# Altium PCB PCB.PcbDoc
Units mil, origin at the board's own origin, x right, y up, seen from the top; angles counter-clockwise.
Board outline 1518.74 x 1345 mil, 2 copper layers (Top Layer, Bottom Layer); 4 components, 5 nets, 10 pads, 0 vias.
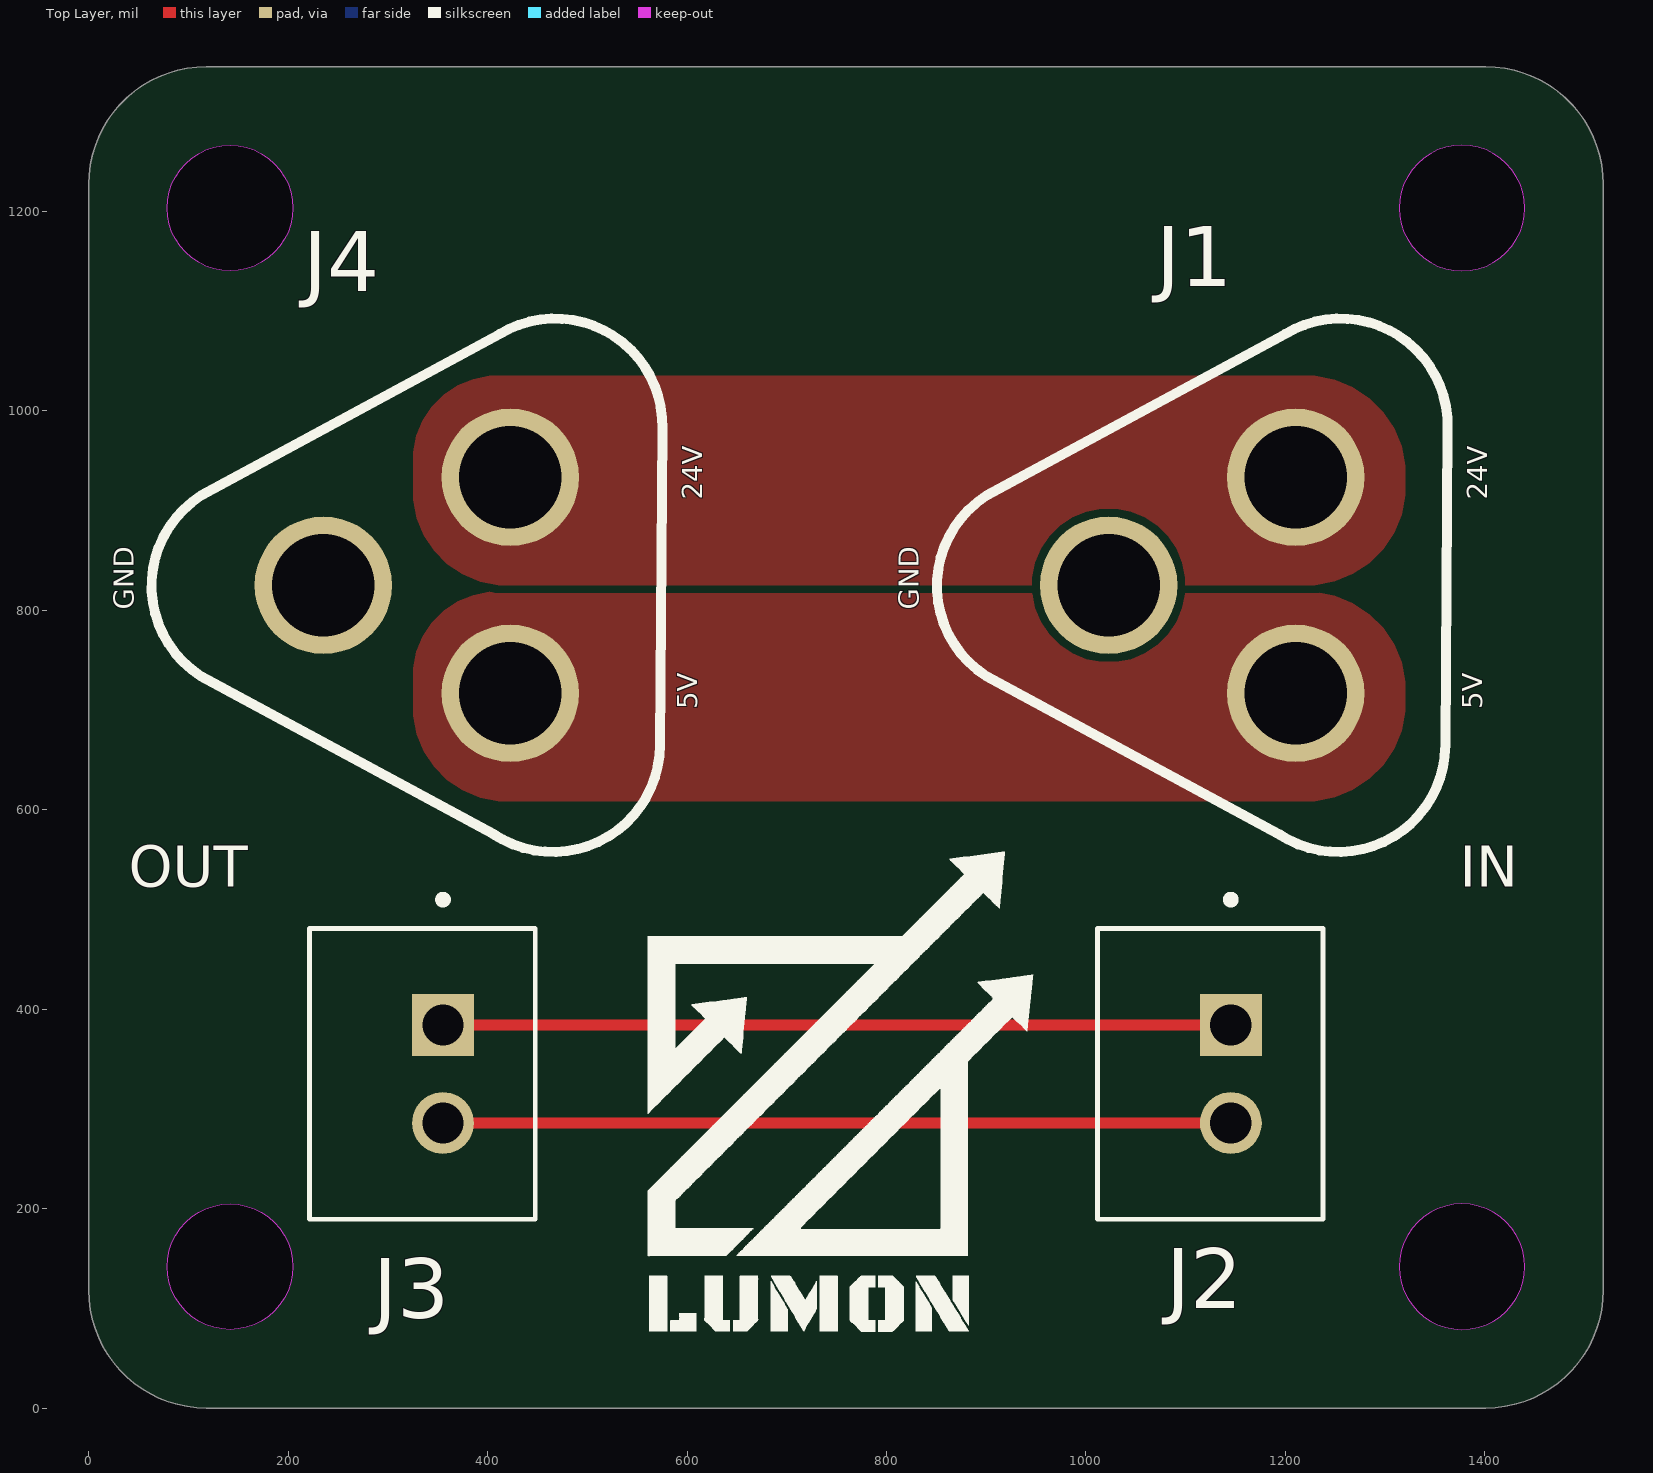
[diagram p0: Top Layer view]
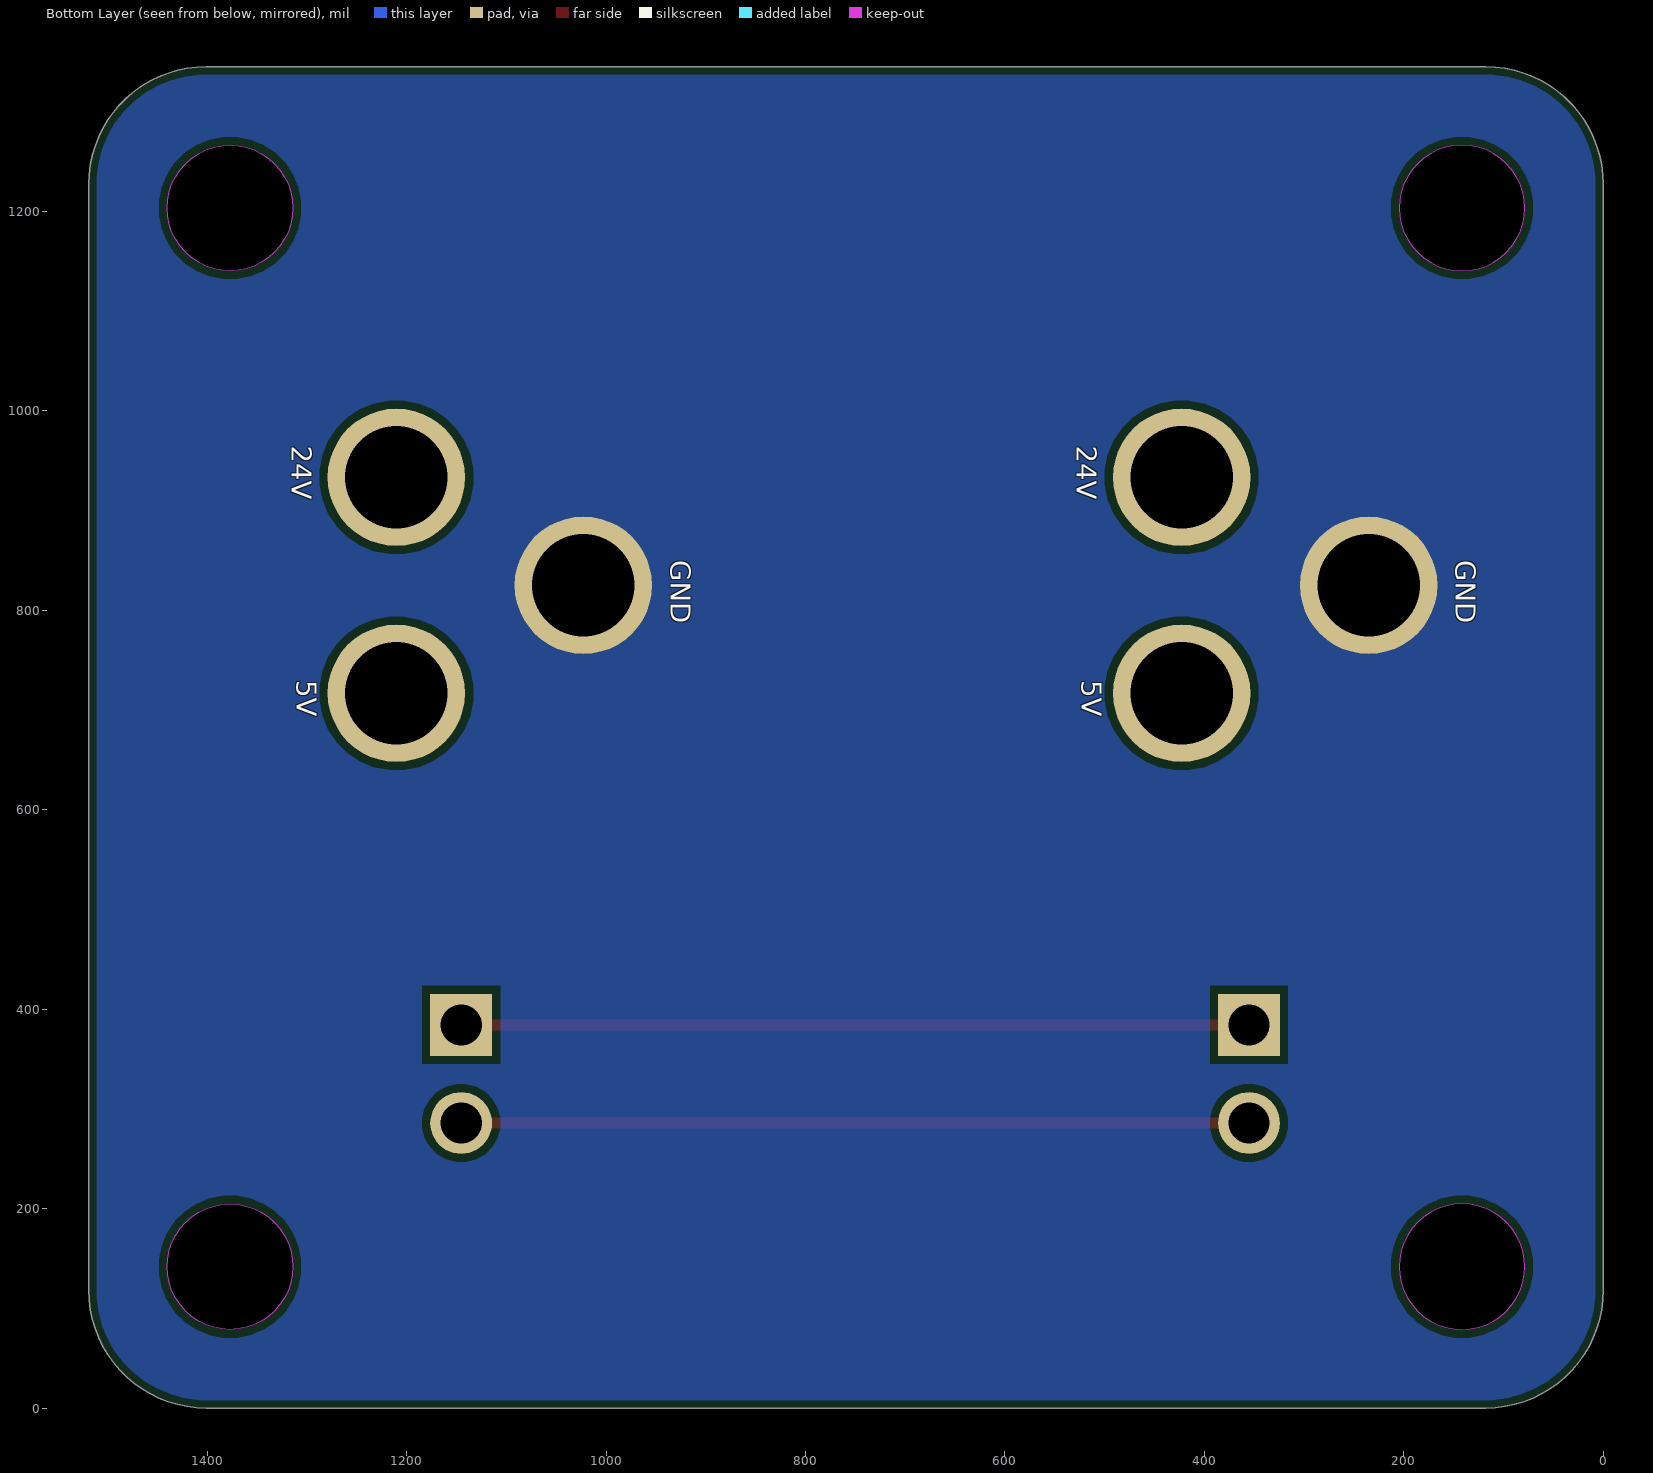
[diagram p1: Bottom Layer view, seen from below]
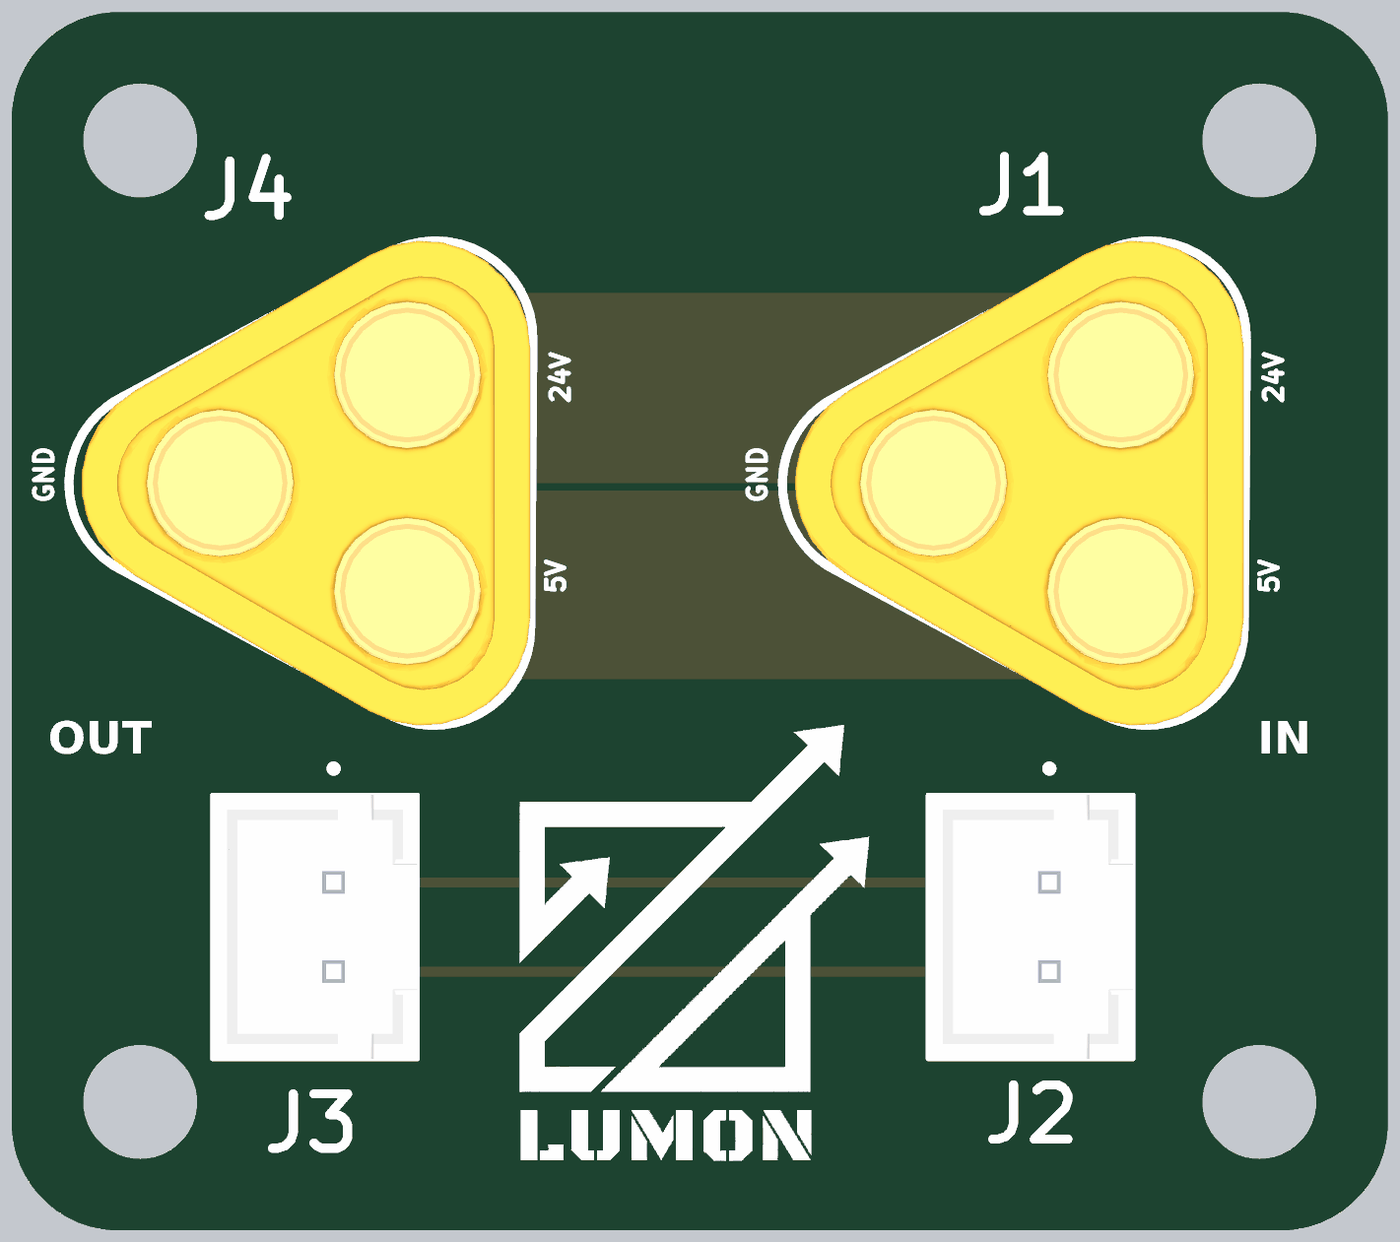
[diagram p2: 3D render of the assembled board from above, using the file's embedded part models]

## Layer stack, top to bottom
Top Solder: solder mask 0.4, Solder Resist, Dk 3.5
Top Layer: signal copper 1.4
Dielectric 1: dielectric 12.6, FR-4, Dk 4.8
Bottom Layer: signal copper 1.4
Bottom Solder: solder mask 0.4, Solder Resist, Dk 3.5

## Board outline
0,118.11 0,1226.89 cw(c118.11,1226.89) 118.11,1345 1400.63,1345 cw(c1400.63,1226.89) 1518.74,1226.89 1518.74,118.11 cw(c1400.63,118.11) 1400.63,0 118.11,0 cw(c118.11,118.11)
cut-out: 1314.02,1203.27 ccw(c1377.01,1203.27) 1377.01,1140.28 ccw(c1377.01,1203.27) 1440,1203.27 ccw(c1377.01,1203.27) 1377.01,1266.26 ccw(c1377.01,1203.27)
cut-out: 1314.02,141.73 ccw(c1377.01,141.73) 1377.01,78.74 ccw(c1377.01,141.73) 1440,141.73 ccw(c1377.01,141.73) 1377.01,204.72 ccw(c1377.01,141.73)
cut-out: 141.73,1140.28 cw(c141.73,1203.27) 78.74,1203.27 cw(c141.73,1203.27) 141.73,1266.26 cw(c141.73,1203.27) 204.72,1203.27 cw(c141.73,1203.27)
cut-out: 141.73,78.74 cw(c141.73,141.73) 78.74,141.73 cw(c141.73,141.73) 141.73,204.72 cw(c141.73,141.73) 204.72,141.73 cw(c141.73,141.73)

## Design rules (kind name [scope] priority, off if disabled: settings)
BoardOutlineClearance [All] p1: gap=7.87 ignorepadtopadclearanceinfootprint=FALSE
Clearance [All] p1: gap=8 ignorepadtopadclearanceinfootprint=FALSE except(9.84: Arc-Hole Track-Hole SMDPad-Hole THPad-Hole Via-Hole Fill-Hole Poly-Hole Region-Hole Text-Hole)
ComponentClearance [All] p1: gap=5 collisioncheckmode=3 verticalgap=5 showdistances=TRUE
DiffPairsRouting [All] p1: maxlimit=15 minlimit=8 mostfreqgap=8 toplayer_minwidth=8 toplayer_maxwidth=1000 toplayer_prefwidth=8 bottomlayer_minwidth=8 bottomlayer_maxwidth=1000 bottomlayer_prefwidth=8 maxuncoupledlength=500
Height [All] p1: minheight=0 maxheight=71497.94 prefheight=500
HoleSize [All] p1: absolutevalues=TRUE maxlimit=248.03 minlimit=11.81 maxpercent=80.000 minpercent=20.000
HoleToHoleClearance [All] p1: gap=9.84 allowstackedmicrovias=FALSE
MinimumAnnularRing [All] p1: minimumring=3
MinimumSolderMaskSliver [All] p1: minsoldermaskwidth=0
PlaneClearance [All] p1: clearance=8
PlaneConnect PlaneConnectPowerPads [InPadClass('PowerPads')] p1: planeconnectstyle=Direct reliefexpansion=20 reliefentries=4 reliefconductorwidth=10 reliefairgap=10
PlaneConnect [All] p2: pad.planeconnectstyle=Relief pad.reliefexpansion=11.81 pad.reliefentries=4 pad.reliefconductorwidth=8 pad.reliefairgap=8 via.planeconnectstyle=Direct via.reliefexpansion=11.81 via.reliefentries=4 via.reliefconductorwidth=5 via.reliefairgap=5
PolygonConnect PolygonConnectPowerPads [All vs (InPadClass('PowerPads'))] p1: connectstyle=Direct reliefconductorwidth=10 reliefentries=4 polygonreliefangle="90 Angle" airgapwidth=10
PolygonConnect [All] p2: thpad.connectstyle=Relief thpad.reliefconductorwidth=8 thpad.reliefentries=4 thpad.polygonreliefangle="90 Angle" thpad.airgapwidth=8 smdpad.connectstyle=Relief smdpad.reliefconductorwidth=8 smdpad.reliefentries=4 smdpad.polygonreliefangle="90 Angle" smdpad.airgapwidth=8 via.connectstyle=Direct via.reliefconductorwidth=5 via.reliefentries=4 via.polygonreliefangle="90 Angle" via.airgapwidth=5
RoutingVias [All] p1: holewidth=11.81 width=23.62 viastyle="Through Hole" minholewidth=11.81 minwidth=23.62 maxholewidth=23.62 maxwidth=259.84
SilkToSilkClearance [All] p1: silktosilkclearance=0
SilkToSolderMaskClearance [IsPad] p1: minsilkscreentomaskgap=5 clearancetoexposedcopper=TRUE
SolderMaskExpansion [All] p1: expansion=2.95 istentingtop=FALSE
Width [All] p1: maxlimit=1000 minlimit=8 preferedwidth=8 minimp=50.000000 maximp=50.000000 favimp=50.000000
20 further rules are at their usual default settings.

## Components (designator, comment, footprint, x,y, rotation, side; value= is the part's Value field where it differs from the comment)
J1 "MT-60" MT-60 1155.27,824.99 r90 top
J2 "B2B-XH-A_(LF)(SN)" JST_B2B-XH-A_(LF)(SN) 1124.6,334.99 r90 top
J3 "B2B-XH-A_(LF)(SN)" JST_B2B-XH-A_(LF)(SN) 334.6,334.99 r90 top
J4 "MT-60" MT-60 367.79,824.99 r90 top

## Footprints (in the part's own frame and the unit in brackets; to place one, negate y for a bottom-side part, rotate by r counter-clockwise, add the part's x,y. Pads: shape width x height; smd on the part's side, far side on the other; paste and mask are expansions set on the pad)
JST_B2B-XH-A_(LF)(SN) [mm]
  rect 1.575x1.575 / inner round 1.575 / far side rect 1.575x1.575 hole 1.05: 1(1.25,-0.525)
  round 1.575 hole 1.05: 2(-1.25,-0.525)
  silkscreen extent -3.7,-2.88 4.54,2.88, body extent -3.7,-2.88 3.7,2.88, height 7
MT-60 [mm]
  round 3.5 hole 2.605: 1(-2.75,-1.397) 2(0,3.366) 3(2.75,-1.397)
  silkscreen extent -6.79,-5.27 6.79,7.74, body extent -6.8,-5.2 6.8,7.39, height 15

## Part data
J1 J4: LCSC part #=C99176
J2 J3: "Connector Header Through Hole 2 position 0.098 (2.50mm)", LCSC part #=C19271386, Package=None, Check_prices=https://www.snapeda.com/parts/B2B-XH-A%20(LF)(SN)/JST+Sales+America+Inc./view-part/?ref=eda, MF="JST Sales", MP="B2B-XH-A (LF)(SN)", SnapEDA_Link=https://www.snapeda.com/parts/B2B-XH-A%20(LF)(SN)/JST+Sales+America+Inc./view-part/?ref=snap

## Nets (pads, with @x,y where several pads share a name; then routed paths per layer and width w, separated by ;. In a path a pad name is that pad's centre, name@x,y a point inside that pad or via, vN(x,y) a via of type N, cw(c..) or ccw(c..) an arc to the next point about the centre after c; other vN are vias at no path point)
GND: J1.2 J4.2
NetJ1_1: J1.1 J4.1
NetJ1_3: J1.3 J4.3
NetJ2_1: J2.1 J3.1 | length 790
  Top Layer w11: J3.1 J2.1
NetJ2_2: J2.2 J3.2 | length 790
  Top Layer w11: J3.2 J2.2

## Polygon pours and split planes (outlines as drawn)
NetJ1_1 on Top Layer "NETJ1_1_L01_P001" (solid, pour order 1): 325.27,703.45 ccw(c420.27,703.45) 420.27,608.45 1220.27,608.45 ccw(c1220.27,708.45) 1320.27,708.45 1320.27,718.45 ccw(c1220.27,718.45) 1220.27,818.45 410.27,818.45 ccw(c410.27,733.45) 325.27,733.45
NetJ1_3 on Top Layer "NETJ1_3_L01_P000" (solid, pour order 0): 325.27,919.99 ccw(c420.27,919.99) 420.27,824.99 1220.27,824.99 ccw(c1220.27,924.99) 1320.27,924.99 1320.27,934.99 ccw(c1220.27,934.99) 1220.27,1034.99 410.27,1034.99 ccw(c410.27,949.99) 325.27,949.99
GND on Bottom Layer "GND_L02_P002" (solid, pour order 2): 0,0 1610,0 1610,1470 0,1470

## Silkscreen, mask and mechanical layers (free items; w line width, h text height)
Top Overlay:
  drawing of 14 lines, arcs and shapes, not listed
  text "OUT" at 40.06,508.97 h70
  text "IN" at 1375,508.97 h70
Mechanical 1:
  circle w10: c1377.01,141.73 r62.99
  circle w10: c1377.01,1203.27 r62.99
  circle w10: c141.73,141.73 r62.99
  circle w10: c141.73,1203.27 r62.99
  lines w10: 0,118.11 ccw(c118.11,118.11) 118.11,0 1400.63,0 ccw(c1400.63,118.11) 1518.74,118.11 1518.74,1226.89 ccw(c1400.63,1226.89) 1400.63,1345 118.11,1345 ccw(c118.11,1226.89) 0,1226.89 0,118.11

## Text inside footprints (layer, text, board x,y; h text height)
J1: Top Overlay "GND" at 832.47,800.6 h20 r90; Top Overlay "24V" at 1402.47,910.6 h20 r90; Top Overlay "5V" at 1397.47,700.6 h20 r90; Bottom Overlay "GND" at 935.26,849.99 h20 r90; Bottom Overlay "5V" at 1310.26,729.99 h20 r90; Bottom Overlay "24V" at 1315.26,964.99 h20 r90
J4: Top Overlay "GND" at 44.99,800.6 h20 r90; Top Overlay "24V" at 614.99,910.6 h20 r90; Top Overlay "5V" at 609.99,700.6 h20 r90; Bottom Overlay "GND" at 147.79,849.99 h20 r90; Bottom Overlay "5V" at 522.79,729.99 h20 r90; Bottom Overlay "24V" at 527.79,964.99 h20 r90